# Altium PCB JadePlus_v0.3.1_board.PcbDoc (part 3 of 3)
Units mm, origin at the board's own origin, x right, y up, seen from the top; angles counter-clockwise.
Board outline 26 x 60.7 mm, 4 copper layers (Top/Sig1, Layer 1, Layer 2, Bottom Layer), stack 0.975 mm thick; 120 components, 82 nets, 471 pads, 1359 vias.
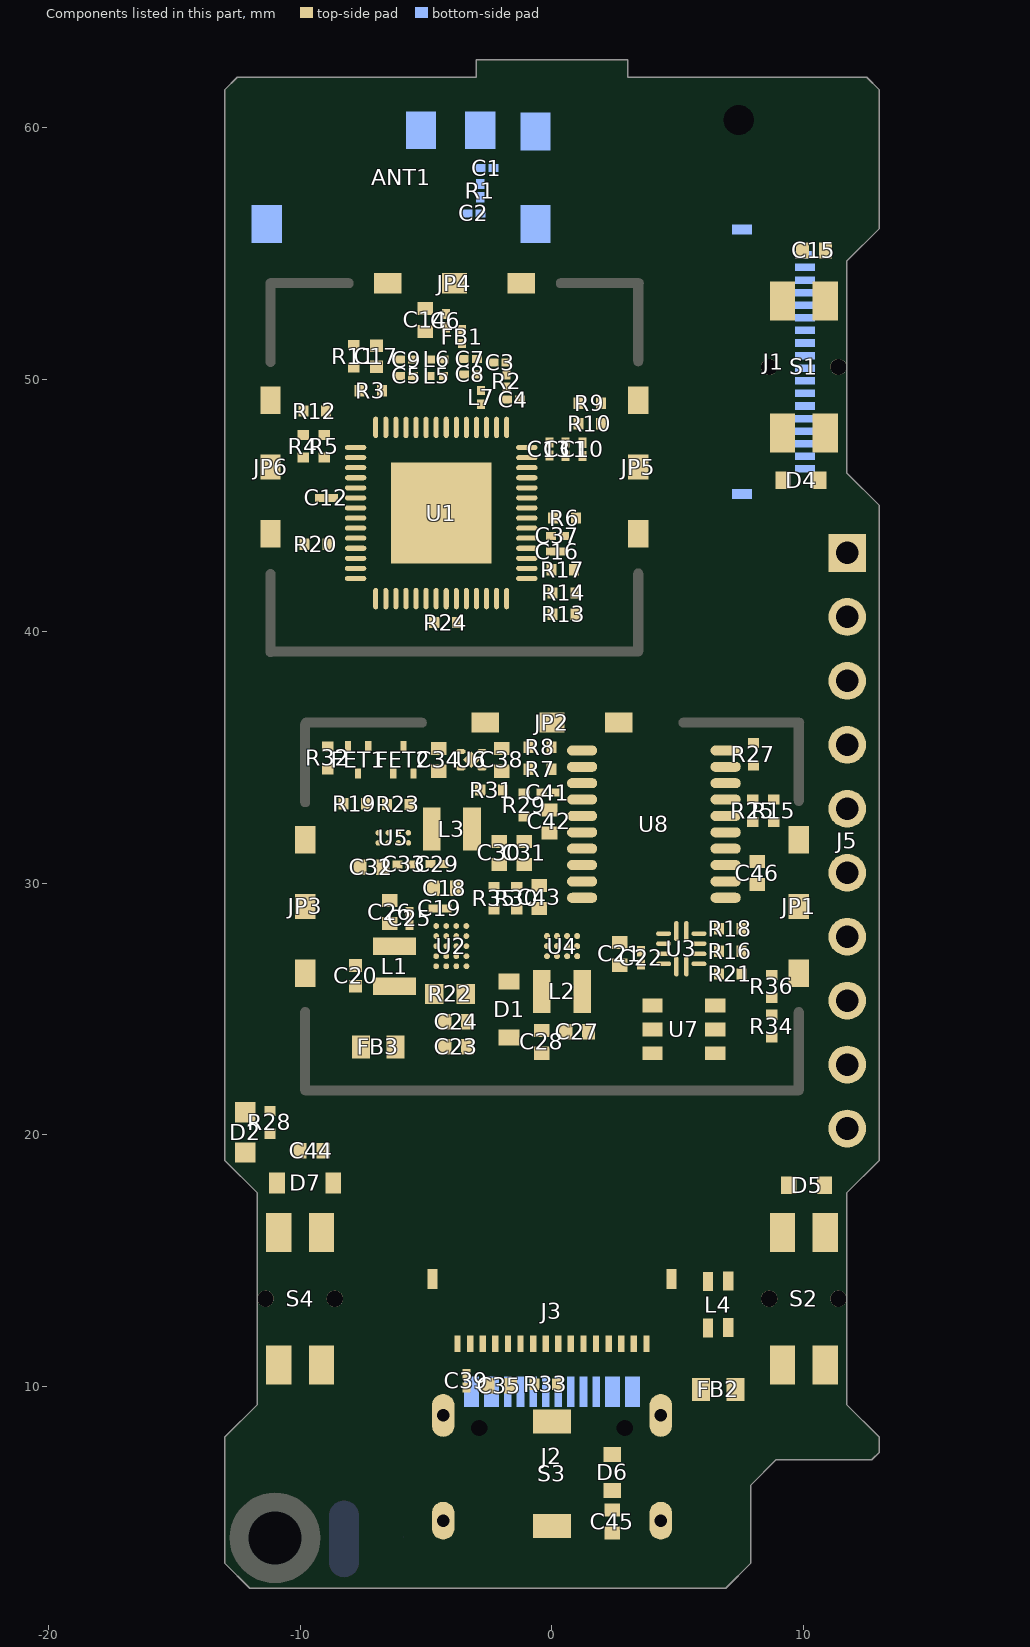
[diagram p5: the components of this part, seen from the top]

## Polygon pours and split planes (outlines as drawn) (continued)
GND on Layer 2 "NONET_L-01_P-001" (solid, remove dead copper, pour order 16): 10.825,63.1 -12.95,63.1 -14.7,61.35 -14.7,2.85 -12.525,0.675 10.525,0.675 14.525,4.675 14.525,61.575 13.225,62.875
VUSB on Layer 2 "NONET_L-01_P-001" (solid, remove dead copper, pour order 13): -3.926,29.419 -2.319,29.419 -1.017,28.117 1.197,28.117 1.6,27.714 1.6,25.675 2.4,26.475 2.4,28.375 1.975,28.8 -0.074,28.8 -1.67,30.396 -2.038,30.396
VUSB on Layer 2 "NONET_L-01_P-001" (solid, remove dead copper, pour order 9): -2.01,30.41 -4.574,30.41 -5.137,29.848 -5.137,29.037 -4.8,28.7 -4.7,28.7 -4,29.4 -0.75,29.4 1.6,27.05 1.6,25.6 2.1,25.1 3.7,25.1 4.2,24.6 5.8,24.6 6.4,24 6.8,24 7.4,23.4 7.4,15.9 7.6,15.7 7.6,14.5 7.5,14.4 7.5,11.5 6.9,10.9 6.9,9.7 7.1,9.5 7.8,9.5 8.2,9.9 8.2,23.9 7.4,24.7 7,24.7 6.3,25.4 4.6,25.4 4.4,25.6 2.8,25.6 2.4,26
GND on Layer 1 "NONET_L-01_P-001" (solid, remove dead copper, pour order 8): 10.6,63.8 -12.1,63.8 -14.3,61.6 -14.3,2.5 -12.3,0.5 8.8,0.5 15.1,6.8 15.1,62.1 12.7,64.5

## Keep-outs
Keep-Out Layer:
  the board outline again, w0.102

## Other copper
Top/Sig1:
  pour cut-out: -2.241,53.016 cw(c-2.431,52.826) -2.163,52.826 -2.163,48.967 ccw(c-1.845,48.967) -2.07,48.742 -2.07,48.451 ccw(c-1.149,48.451) -1.8,47.8 ccw(c-2.727,48.727) -1.416,48.727 -1.416,49.049 ccw(c-1.493,49.126) -1.384,49.126 -1.384,53.012 cw(c-1.384,53.114) -1.456,53.042 -1.851,53.437
  region net NetC29_2: -4.618,30.904 -4.618,31.11 -4.426,31.303 -4.452,31.329 -5.124,31.329 -5.123,31.328 -5.123,31.223 -5.019,31.12 -5.019,30.878 -4.94,30.878 -4.801,30.739
  region net NetC29_2: -5.699,32.027 -4.926,32.8 -4.8,32.8 -4.8,31.451 -4.722,31.373 -5.073,31.373 -5.7,32
  pour cut-out: -5.694,32.2 -7.081,32.2 -7.081,31.466 -5.464,31.466 -5.464,32.205
  region net VBAT: -5.563,31.595 -5.563,31.244 -5.439,31.121 -5.295,31.121 -5.208,31.033 -5.208,30.8 -5.418,30.589 -5.527,30.698 -5.631,30.698 -5.631,30.907 -5.761,31.037
  region net VDD_3V3: -3.522,31.3 -0.779,31.3 -0.641,31.438 -0.641,31.979 -0.808,32.146 -1.346,32.146 -2.2,33 -3,33 -3,32.8 -3.3,32.5
  region net VBAT_EXT: -8,24 -8,22.427 -7.824,22.251 -7.004,22.251 -6.872,22.384 -6.872,22.954 -7.053,23.135 -7.053,23.996 -7.153,24.095 -7.932,24.095 -7.995,24.031
  pour cut-out: -1.588,49.237 -1.588,49.474 -1.461,49.601 -0.435,49.601 -0.303,49.469 -0.303,48.989 -0.437,48.854 -1.437,48.854 -1.585,49.002
  region net VDD_3V3: -1.014,47.407 -0.527,47.407 -0.304,47.183 1.917,47.183 2,47.1 2,46.5 1.9,46.4 1.6,46.4 1.3,46.7 -0.5,46.7 -0.703,46.903 -1.095,46.903 -1.141,46.949 -0.963,46.949 -0.869,47.043 -0.869,47.16 -1.011,47.303 -1.241,47.303
  region net VDD_3V3: -4.561,52.4 -4.442,52.281 -3.481,52.281 -3.3,52.1 -3.3,51.9 -3.4,51.8 -4.089,51.8 -4.689,51.2 -5.5,51.2 -5.7,51.4 -5.7,52.3 -5.6,52.4
  region net VDDP_3V3: -3.726,51.383 -3.726,49.826 -3.7,49.8 -3.551,49.949 -3.3,49.949 -3.3,51.167 -3.566,51.433
  region net VDDP_3V3: -3.3,50.1 -3.3,49.949 -3.223,49.872 -2.778,49.872 -2.657,49.751 -2.976,49.432 -2.976,49.387 -3.287,49.387 -3.7,49.8 -3.7,50.1 -3.6,50.1 -3.5,50.2
  region net NetL7_1: -2.975,49.017 -2.975,48.744 -2.6,48.369 -2.6,48.3 -2.5,48.4 -2.5,48.174 -2.469,48.205 -2.329,48.205 -2.248,48.123 -2.097,48.275 -2.097,48.528 -2.66,49.091 -2.66,49.181 -2.817,49.024
  pour cut-out: 1.217,28.154 -0.427,28.154 -0.427,26.854 1.246,26.854
  pour cut-out: -3.502,28.505 -4.997,28.505 -4.997,26.577 -3.229,26.577 -3.229,28.503
  pour cut-out: 3.963,11.969 -4.028,11.969 -4.028,11.483 3.978,11.483 3.978,11.473
  region net NetD1_1: -0.747,26.566 -0.878,26.435 -2.116,26.435 -2.163,26.389 -2.163,25.8 -2.076,25.713 -1.008,25.713 -0.6,25.305 -0.4,25.504 -0.4,25.7
  region net NetD1_1: -0.316,27.135 -0.316,26.997 -0.747,26.566 -0.747,26.522 -0.079,26.522 -0.048,26.553 -0.08,26.585 -0.08,27.099 -0.137,27.099 -0.199,27.161
  region net NetC20_1: -4.492,26.019 -4.785,26.019 -5.105,26.34 -8.016,26.34 -8.144,26.212 -8.144,25.643 -7.991,25.491 -5.758,25.491 -5.368,25.1 -4.35,25.1 -4.225,25.225 -4.225,26.075
  region net NetL1_1: -4.135,27.631 -4.931,27.631 -5.152,27.852 -5.415,27.852 -5.7,27.567 -5.7,27.4 -5.65,27.4 -5.398,27.148 -5.032,27.148 -4.768,27.412
  region net NetC25_2: -6.145,28.662 -6.025,28.541 -5.204,28.541 -4.671,28.009 -4.671,27.811 -4.888,28.028 -6.646,28.028 -6.764,28.146 -6.542,28.368 -6.542,28.496
  region net VUSB: -4.549,30.112 -4.995,30.112 -5.204,29.904 -5.204,28.925 -4.778,28.498 -4.778,28.315 -4.669,28.206 -4.505,28.371 -4.326,28.371 -4.505,28.55 -4.505,29.315 -4.383,29.437 -4.383,30.061 -4.439,30.117
  region net VUSB: 7.6,10.7 7.025,10.7 6.855,10.53 6.855,9.493 7.021,9.327 7.567,9.327 7.779,9.539 7.779,10.526 7.6,10.704
  region net NetFB2_2: 5.9,10.4 5.5,10.4 5.3,10.2 5.3,8.951 5.49,8.761 6.172,8.761 6.355,8.943 6.355,10.28 6.236,10.399
  region net VBAT: -3.8,24.1 -3.8,23.1 -4,22.9 -4.8,22.9 -5.85,23.95 -5.85,23.777 -6.576,23.051 -5.951,23.051 -5.1,22.2 -3.1,22.2 -2.925,22.375
  region net VLED: -1.291,24.192 -0.599,23.5 -0.2,23.5 -0.7,23 -1.257,23.557 -1.335,23.557 -1.563,23.786
  region net VBAT: -3.794,25.91 -3.794,22.794 -3.2,22.2 1.4,22.2 1.8,22.6 1.8,26.303 1.56,26.543 0.869,25.852 0.869,24.536 1.001,24.403 1.001,22.931 0.858,22.787 -2.569,22.787 -2.946,23.164 -2.946,25.892 -3.057,26.003 -3.273,25.787 -3.587,25.787
Layer 1:
  pour cut-out: -1.588,49.237 -1.588,49.474 -1.461,49.601 -0.435,49.601 -0.303,49.469 -0.303,48.989 -0.437,48.854 -1.437,48.854 -1.585,49.002
Layer 2:
  region net VDD_3V3: -2.425,32.9 -1.975,32.9 -1.625,32.55 -1.625,32.275 -1.775,32.125 -2.275,32.125 -2.7,32.55
  region net VBAT: -5.813,30.843 -5.813,30.555 -5.943,30.425 -6.807,30.425 -7.326,30.944 -7.802,30.944 -7.896,30.85 -7.896,30.237 -7.422,29.763 -5.184,29.763 -4.984,29.963 -4.984,31.063 -5.084,31.163 -5.73,31.163 -5.815,31.078
Bottom Layer:
  pour cut-out: -3.2,56.504 -3.2,58.276 ccw(c-3.757,58.495) -3.334,58.918 cw(c-2.895,58.48) -2.895,59.1 -2.1,59.1 -2.5,58.7 -2.5,56.309 ccw(c-0.544,55.98) -1.946,54.578 -1.747,54.379 cw(c-2.624,53.502) -1.384,53.502 -1.384,53.012 -2.132,53.012 cw(c-2.132,53.156) -2.234,53.054 -2.234,53.458 ccw(c-2.744,53.459) -2.383,53.819 -2.468,53.904 cw(c-0.672,55.7) -3.212,55.7 -3.212,56.441
  region net VDD_3V3: 10.775,43.825 10.325,43.825 9.925,43.425 5.025,43.425 4.4,44.05 4.4,41.85 5.275,42.725 10.075,42.725 10.4,42.4 10.825,42.825 11.9,42.825
  region net VDD_3V3: -0.272,43.37 0.024,43.37 0.161,43.507 0.161,43.728 0.333,43.9 0.8,43.9 0.825,43.875 1,44.05 1.925,44.05 1.654,44.321 -0.179,44.321 -0.45,44.05 -0.45,43.55 -0.275,43.375
  region net VDD_3V3: 1.446,46.222 1.446,47.148 1.566,47.267 2.109,47.267 2.2,47.176 2.2,45.7 2,45.5
  region net VBAT_EXT: -7.992,10.308 -7.992,9.492 -6.5,8 -6.5,4.185 -6.265,4.185 -5.325,5.125 -5.325,8.733 -7.5,10.908 -7.5,11.5
  region net VDD_3V3: -8.63,47.281 -8.63,45.887 -9.017,45.499 -9.017,45.003 -8.597,44.583 -8.5,44.68 -8.5,45.5
  region net VDD_3V3: -7.4,51.7 -5.8,51.7 -5.5,52 -4.848,52 -4.603,51.756 -4.603,51.16 -4.763,51 -6.15,51
  pour cut-out: 2.898,10.279 -3.8,10.279 -3.8,9.419 3.6,9.419 3.6,10.3
  region net VDD_3V3: 9.003,55.314 4.714,55.314 3.717,54.317 3.717,38.517 -0.2,34.6 -0.2,34.1 -0.5,33.8 -1.6,33.8 -1.8,34 -1.876,33.924 -1.876,32.678 -0.722,32.678 -0.6,32.8 -1.072,32.8 -1.295,33.023 -1.303,33.151 -1,33.4 0,33.4 4.536,37.936 4.536,53.636 5.6,54.7 9,54.7 9.2,54.9 9.2,55.1 9,55.3
  region net VDD_3V3: -7.4,51.7 -8.7,50.4 -8.7,34.8 -7.5,33.6 -4,33.6 -2.7,32.3 -1.8,32.3 -1.4,32.7 -2,33.3 -2.4,33.3 -3.8,34.7 -6.8,34.7 -7.889,35.789 -7.889,49.312 -7.939,49.362 -7.939,49.761 -7.6,50.1 -7.6,50.6 -7.2,51 -5.1,51 -5,51.1 -5,51.5 -5.2,51.7
  region net VBAT_EXT: -7.992,22.85 -7.992,10.308 -6.9,10.308 -6.9,22.9 -7,23 -7.886,23 -8.013,22.873
  region net VBAT_EXT: -6.507,2.814 -6.507,5.262 -6.207,5.562 -5.607,5.562 -5.307,5.262 -5.307,2.814 -5.607,2.514 -6.207,2.514
Multi-Layer:
  pour cut-out: -1.809,53.012 -2.234,53.012 ccw(c-1.809,53.012) -1.809,52.587
  pour cut-out: -1.809,53.012 -1.809,53.437 ccw(c-1.809,53.012) -2.234,53.012
  pour cut-out: -1.809,53.012 -1.384,53.012 ccw(c-1.809,53.012) -1.809,53.437
  pour cut-out: -1.809,53.012 -1.809,52.587 ccw(c-1.809,53.012) -1.384,53.012

## Silkscreen, mask and mechanical layers (free items; w line width, h text height)
Top Overlay:
  circle w0.152: c-8.375,31.825 r0.5
  circle w0.152: c-9.625,52.25 r0.5
  region: 3.824,15.056 4.218,15.45 3.403,15.45
  text "T" at 6.35,50.546 h1.52
  text "G38" at 5.969,48.146 h1.2
  text "+" at 10.414,44.808 h1.2
  text "+" at -2.007,26.52 h1.2
  text "JADE Plus v0.3.1 2024-7-16" at -11.938,22.657 h0.51 r90
  text "+" at -12.5,21.576 h1.2
  text "+" at -11.379,18.672 h1.2
  text "+" at 10.77,18.469 h1.2
  text "D" at 6.985,16.002 h1.52
  text "PWR" at -7.112,12.192 h1.2 r90
  text "G39" at 8.966,8.853 h1.2
  text "+" at 3.023,7.394 h1.2
  text "A" at -2.921,6.096 h1.52
  text "STM PA4" at -1.829,3.058 h1
  text "ESP G40" at -1.829,2.169 h1
Board Layer Stack Bottom Overlay:
  circle w0.178: c-0.007,50.332 r0.508
  circle w0.1: c0,49.5 r2
  region: 6.937,54.917 6.542,55.312 6.542,54.496
  lines w0.1: -12,10.5 12,10.5 ; 2.5,51.5 2.5,52 ; 4.76,43.5 -11,43.5 -11,10.5 11,10.5 11,18.464 ; 5.588,23.673 5.588,20.673 6.35,19.911 ; 5.588,26.591 5.588,29.591 6.35,30.353 5.588,31.115 5.588,36.115 ; 5.588,38.434 5.588,43.434 6.35,44.196 ; 6.1,46 6.5,46 ; 2.5,52 2.5,52
  lines w0.127: -0.591,48.198 -0.007,48.782 ; -0.591,48.719 -0.007,49.303 0.565,49.303 0.933,49.671 ; -0.007,49.824 -0.007,48.782 ; 0.577,48.198 -0.007,48.782 ; 5,55.4 6.6,55.4 4.83,55.4 4.83,52 2.5,52 ; 2.5,52 -2.5,52 -2.5,47 2.5,47 2.5,52
  lines w0.152: 2.5,47 4.83,47 4.83,46 6.5,46 6,46
  text "3V3" at 9.998,42.534 h1.5
  text "TXD" at 9.998,40.02 h1.5
  text "ESP" at 5.908,38.1 h1 r90
  text "RXD" at 9.998,37.507 h1.5
  text "RST" at 9.998,34.961 h1.5
  text "GPIO0" at 9.998,32.415 h1.5
  text "GND" at 9.998,29.869 h1.5
  text "SRT" at 9.998,27.323 h1.5
  text "STM" at 5.908,26.028 h1 r90
  text "CLK" at 9.998,24.777 h1.5
  text "DIO" at 9.998,22.231 h1.5
  text "STB" at 9.998,19.686 h1.5
  text "+" at -5.33,5.821 h0.76
Top Solder:
  rectangle: -3.044,62.055 3.046,62.7
Board Layer Stack Bottom Solder:
  rectangle: -3.044,62.055 3.046,62.7
Mechanical 1:
  lines w0.1: -13,8 -13,8 ; -13,8 -11.7,9.3 -11.7,17.7 -13,19 -13,61.5 -12.5,62 -3,62 -3,62.7 3,62.7 3,62 12.5,62 13,61.5 13,56 11.7,54.7 11.7,46.3 13,45 13,19 11.7,17.7 11.7,9.3 13,8 ; -13,8 -13,3 -12,2 6.9,2 7.9,3 7.9,6.1 8.9,7.1 12.7,7.1 13,7.4 13,8 ; 13,8 13,8
Mechanical 6:
  text "JADE Plus v0.3 0626" at -13.603,21.903 h0.51 r90

## Text inside footprints (layer, text, board x,y; h text height)
S1: Mechanical 13 "PCB Edge" at 12.05,48.1 h0.13 r90
S2: Mechanical 13 "PCB Edge" at 12.05,11.1 h0.13 r90
S4: Mechanical 13 "PCB Edge" at -12.05,15.9 h0.13 r270